# EAGLE board Blank Shield (from mega shield) v6 (EAGLE 9.7.0)

Size 101.6 x 53.34 mm. Coordinates in mm from the lower left corner, seen from the top.
Outline: 99.06,40.64 101.6,38.1 101.6,3.81 99.06,1.27 99.06,1 arc-90 98.06,0 1,0 arc-90 0,1 0,52.34 arc-90 1,53.34 96.11,53.34 arc-45 96.81,53.05 99.06,50.8 99.06,40.64
Copper layers (1*16): Top 0.035mm / dielectric 1.5mm / Bottom 0.035mm
Design rules "default *": minimum track width 10mil, minimum drill 24mil, track to track 8mil, track to pad 8mil, pad to pad 8mil, via to via 8mil, smd to smd 8mil, copper to edge 40mil, drill to drill 8mil, minimum pad ring 10mil, minimum via ring 8mil, stop-mask expansion 2mil, vias tented up to drill 0mil, thermal gap 10mil
Holes 3.2 mm at 15.24,50.8 66.04,7.62 55.3,26.84 66.04,35.56 90.17,50.8

## Footprints (pad centres in the part's own frame; a part is rotated, then mirrored left to right if it is on the bottom)
1X02 = drill 1.016 long: 1 -1.27,0; 2 1.27,0
1X08-TH = drill 0.95 pad 1.422 long: 1 -8.89,0; 2 -6.35,0; 3 -3.81,0; 4 -1.27,0; 5 1.27,0; 6 3.81,0; 7 6.35,0; 8 8.89,0
1X10-TH = drill 0.95 pad 1.422 long: 1 -11.43,0; 2 -8.89,0; 3 -6.35,0; 4 -3.81,0; 5 -1.27,0; 6 1.27,0; 7 3.81,0; 8 6.35,0; 9 8.89,0; 10 11.43,0
2X08 = drill 1.016 octagon: 1 -8.89,-1.27; 2 -8.89,1.27; 3 -6.35,-1.27; 4 -6.35,1.27; 5 -3.81,-1.27; 6 -3.81,1.27; 7 -1.27,-1.27; 8 -1.27,1.27; 9 1.27,-1.27; 10 1.27,1.27; 11 3.81,-1.27; 12 3.81,1.27; 13 6.35,-1.27; 14 6.35,1.27; 15 8.89,-1.27; 16 8.89,1.27

## Placement (x,y rotation side)
+5V  [1X02]  95.25,50.8 0 top
ADCH  [1X08-TH]  82.55,2.54 0 top
ADCL  [1X08-TH]  59.69,2.54 0 top
COMM  [1X08-TH]  77.47,50.8 0 top
GND  [1X02]  95.25,7.62 0 top
J1  [1X08-TH]  54.61,50.8 180 top
J3  [1X10-TH]  30.23,50.8 180 top
J7  [1X08-TH]  36.83,2.54 0 top
JP3  [2X08]  95.25,39.37 270 top
JP4  [2X08]  95.25,19.05 270 top

## Library data of the parts
+5V GND JP3 JP4 = pinhead
ADCH ADCL COMM J1 J3 J7 = Smartprj

## Nets
N$142: JP3.1
N$144: JP3.2
N$145: JP3.3
N$146: JP3.4
N$147: JP3.5
N$148: JP3.6
N$149: JP3.7
N$150: JP3.8
N$151: JP3.9
N$152: JP3.10
N$154: JP3.11
N$157: JP3.12
N$158: JP3.13
N$159: JP3.14
N$160: JP3.15
N$161: JP3.16
N$162: JP4.1
N$163: JP4.2
N$164: JP4.3
N$166: JP4.4
N$169: JP4.5
N$170: JP4.6
N$171: JP4.7
N$172: JP4.8
N$173: JP4.9
N$174: JP4.10
N$175: JP4.11
N$176: JP4.12
N$181: JP4.13
N$182: JP4.14
N$183: JP4.15
N$184: JP4.16